# Altium PCB HI_Amplifier.PcbDoc
Units mil, origin at the board's own origin, x right, y up, seen from the top; angles counter-clockwise.
Board outline 3295 x 625 mil, 2 copper layers (Top Layer, Bottom Layer); 46 components, 26 nets, 116 pads, 329 vias.
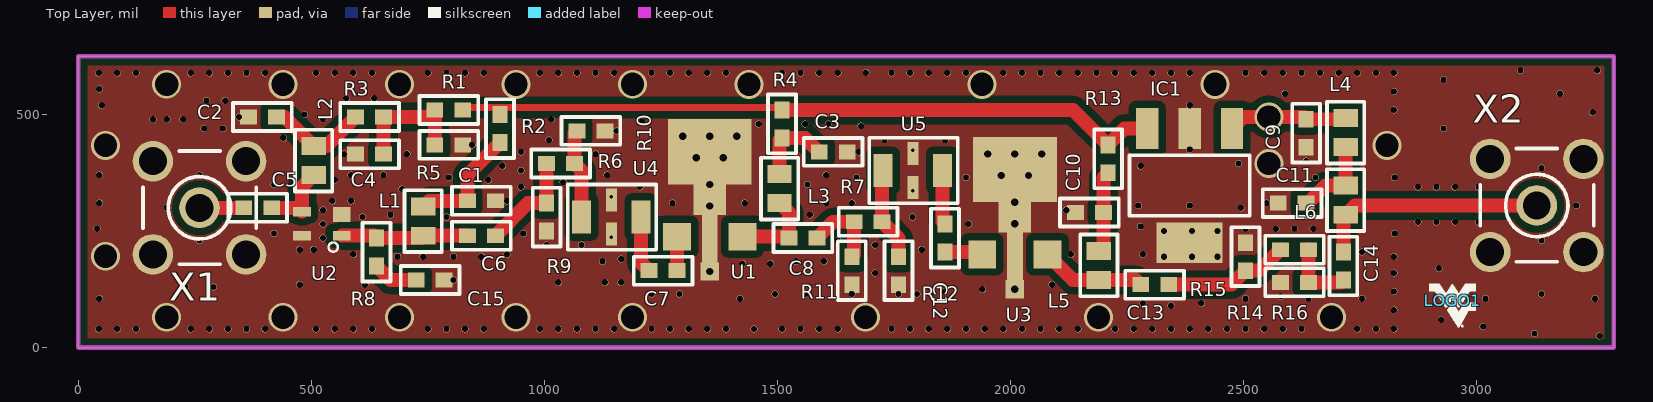
[diagram p0: Top Layer view]
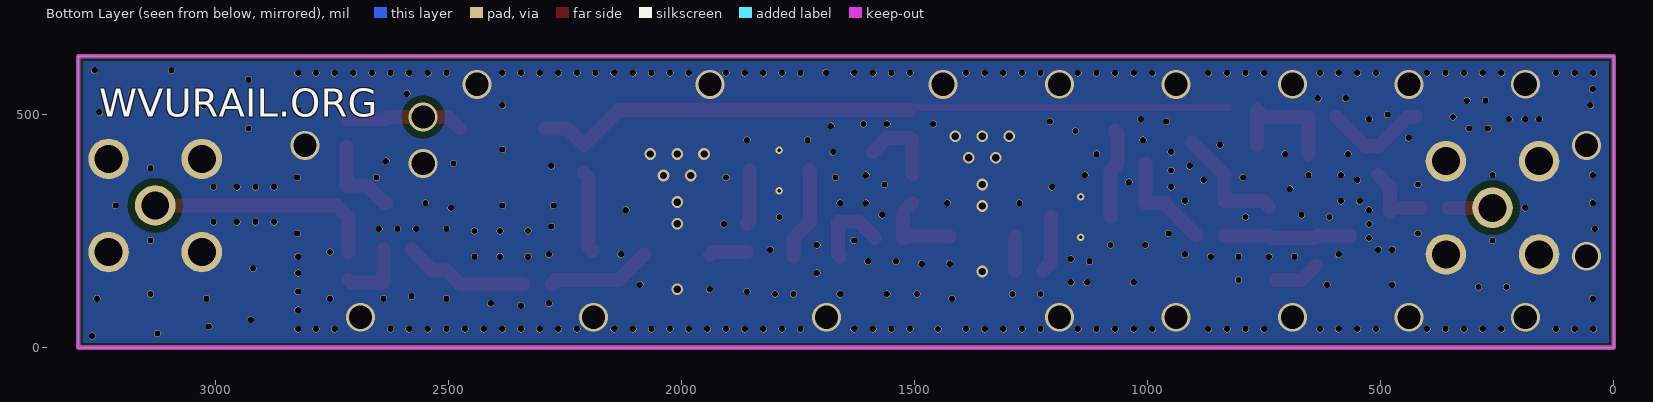
[diagram p1: Bottom Layer view, seen from below]

## Layer stack, top to bottom
Top Solder: solder mask 0.4, Solder Resist, Dk 3.5
Top Layer: signal copper 1.4
Dielectric 1: dielectric 12.6, FR-4, Dk 4.8
Bottom Layer: signal copper 1.4
Bottom Solder: solder mask 0.4, Solder Resist, Dk 3.5

## Board outline
0,0 0,625 3295,625 3295,0

## Design rules (kind name [scope] priority, off if disabled: settings)
Clearance Clearance_1 [InNamedPolygon('Top Layer-GND')] p1: gap=15 ignorepadtopadclearanceinfootprint=FALSE except(0: Arc-Hole Track-Hole SMDPad-Hole THPad-Hole Via-Hole Fill-Hole Poly-Hole Region-Hole Text-Hole; 10: SMDPad-SMDPad SMDPad-THPad SMDPad-Via SMDPad-Text THPad-THPad THPad-Via THPad-Text Via-Via Via-Text Fill-Fill Fill-Poly Fill-Region Fill-Text Poly-Poly Poly-Region Poly-Text Region-Region Region-Text Text-Text)
Clearance [All] p2: gap=5 ignorepadtopadclearanceinfootprint=FALSE except(0: Arc-Text Arc-Hole Track-Text Track-Hole SMDPad-Text SMDPad-Hole THPad-Text THPad-Hole Via-Text Via-Hole Fill-Text Fill-Hole Poly-Text Poly-Hole Region-Text Region-Hole Text-Text Text-Hole; 3: SMDPad-SMDPad SMDPad-THPad SMDPad-Via THPad-Via Via-Via; 10: THPad-THPad; 15: THPad-Fill THPad-Poly THPad-Region Via-Fill Via-Poly Via-Region)
ComponentClearance [All] p1: gap=0 collisioncheckmode=3 verticalgap=0 showdistances=FALSE
PolygonConnect PolygonConnect_2 [All vs IsNamedPolygon('Bottom Layer-GND')] p1: connectstyle=Direct reliefconductorwidth=10 reliefentries=4 polygonreliefangle="90 Angle" airgapwidth=10
PolygonConnect PolygonConnect_1 [All vs IsNamedPolygon('Top Layer-GND')] p2: connectstyle=Direct reliefconductorwidth=10 reliefentries=4 polygonreliefangle="90 Angle" airgapwidth=10
PolygonConnect [All] p3: connectstyle=Relief reliefconductorwidth=10 reliefentries=4 polygonreliefangle="90 Angle" airgapwidth=10
RoutingVias [All] p1: holewidth=28 width=50 viastyle="Through Hole" minholewidth=28 minwidth=50 maxholewidth=28 maxwidth=50
SolderMaskExpansion [All] p1: expansion=4
Width [All] p1: maxlimit=50 minlimit=10 preferedwidth=30 bottomlayer_maxwidth=10 bottomlayer_prefwidth=10 minimp=50.000000 maximp=50.000000 favimp=50.000000
29 further rules are at their usual default settings.

## Components (designator, comment, footprint, x,y, rotation, side; value= is the part's Value field where it differs from the comment)
C1 "27pF" 0603 835,315 r0 top
C2 "330pF" 0603 365,495 r0 top
C3 "330pF" 0603 1590,420 r0 top
C4 "4700pF" 0603 595,415 r0 top
C5 "27pF" 0603 355,300 r0 top
C6 "27pF" 0603 835,240 r0 top
C7 "330pF" 0603 1225,165 r0 top
C8 "330pF" 0603 1525,235 r0 top
C9 "330nF" 0603 2635,490 r270 top
C10 "330pF" 0603 2200,290 r180 top
C11 "330pF" 0603 2635,310 r180 top
C12 "330pF" 0603 1860,265 r270 top
C13 "330pF" 0603 2280,135 r0 top
C14 "330pF" 0603 2715,145 r90 top
C15 "27pF" 0603 785,145 r180 top
IC1 "Voltage Regulator LM2940" SOT223 2385,348 r180 top
L1 "100nH" 0805 740,240 r90 top
L2 "10nH" 0805 505,370 r90 top
L3 "100nH" 0805 1505,310 r90 top
L4 "100nH" 0805 2720,430 r90 top
L5 "100nH" 0805 2190,145 r90 top
L6 "100nH" 0805 2720,285 r90 top
LOGO1 "WVULOGO1" WVULOGO1 2950,100 r0 top
R1 "33k" 0603 765,510 r0 top value=DNL
R2 "27" 0603 905,440 r90 top value=DNL
R3 "50" 0603 595,495 r0 top value=DNL
R4 "43" 0603 1510,450 r90 top value=DNL
R5 "4.7k" 0603 825,435 r180 top value=DNL
R6 "5.8" 0603 1005,395 r0 top value=DNL
R7 "5.8" 0603 1665,270 r0 top value=DNL
R8 "50" 0603 640,175 r90 top value=DNL
R9 "870" 0603 1005,250 r90 top value=DNL
R10 "870" 0603 1130,465 r180 top value=DNL
R11 "870" 0603 1660,135 r90 top value=DNL
R12 "870" 0603 1760,135 r90 top value=DNL
R13 "43" 0603 2210,375 r90 top value=DNL
R14 "5.8" 0603 2580,210 r0 top value=DNL
R15 "870" 0603 2505,225 r270 top value=DNL
R16 "870" 0603 2580,140 r0 top value=DNL
U1 "GALI 39+" SBA5089 1355,420 r0 top
U2 "SAV-541" SOT343 522,265.59 r90 top
U3 "GALI 39+" SBA5089 2009.92,382.09 r0 top
U4 "BFCN-1445" FV1206 1080,280 r0 top
U5 "BFCN-1445" FV1206 1727.05,380 r0 top
X1 "J1" LTI-SASF54GT 260,300 r0 top
X2 "SMA vertical PCB thrue hole jack   Source: Lighthorse Technologies, inc. SASF54GT.pdf" LTI-SASF54GT 3130,305 r0 top

## Footprints (in the part's own frame and the unit in brackets; to place one, negate y for a bottom-side part, rotate by r counter-clockwise, add the part's x,y. Pads: shape width x height; smd on the part's side, far side on the other; paste and mask are expansions set on the pad)
0603 [mil]
  rect 36x32 smd: 1(0,0) 2(60,0)
  silkscreen extent -33,-30 93,30
0805 [mil]
  rect 38.5x52 smd: 1(0,0) 2(62.5,0)
  silkscreen extent -35,-40 98,40
FV1206 [mm]
  rect 1.04x1.8 smd: 1(0,0) 3(3.25,0)
  rect 0.61x1.245 smd: 2(1.625,-0.927) 4(1.625,0.928)
  round 0.4 hole 0.203: 2_1(1.625,-1.105) 4_1(1.625,1.105)
  silkscreen extent -0.76,-1.78 4.06,1.78
LTI-SASF54GT [mil]
  round 87 hole 60: 1(0,0) 2(-100,100) 3(100,100) 4(100,-100) 5(-100,-100)
  silkscreen extent -121,-121 122,122
SBA5089 [mm]
  rect 1.52x1.52 smd: 1(-1.78,-4.625) 3(1.78,-4.625)
  rect 1x1 smd: 2(0,-6.525)
  rect 0.86x2.61 smd: 2_1(0,-4.725)
  rect 1.78x1.65 smd: 2_2(0,-2.605)
  rect 4.57x3.56 smd: 2_3(0,0)
SOT223 [mil]
  rect 48x88 smd: 1(-91,-122) 2(0,-122) 3(91,-122)
  rect 142x87 smd: 4(0,123)
  silkscreen extent -129,-65 129,65
SOT343 [mil]
  rect 20x38 smd: 1(-25.59,-43.31) 3(26,42) 4(-25.59,42)
  rect 32x38 smd: 2(20,-43.31)
  silkscreen extent -60,-35 -40,-15
WVULOGO1 [mil]
  silkscreen extent -51,-56 49,37

## Part data
C1 C2 C3 C4 C5 C6 C7 C8 C9 C10 C11 C12 C13 C14 C15: library part Cap0603, "Capacitor, Ceramic, 0603"
IC1: library part V_REG_LM2940SOT223_1
L1 L2 L3 L4 L5 L6: library part Inductor0, "Inductor", Manufacturer="Taiyo Yuden", Manufacturers P/N=CBL2012T470M, Param=0603
R1 R2 R3 R4 R5 R6 R7 R8 R9 R10 R11 R12 R13 R14 R15 R16: library part Res0603, "Resistor", Param=1%, Param1=100ppm/C
U1 U3: "RFMD Amplifier DC-5Ghz", ManufPartNumber="GALI 39+", PartConstraints="NF=2.4dB , IP3=23dBm, S21=21dB"
U4 U5: Manufacturer=Minicircuits, CanPurchaseFrom=Minicircuits, Manufacturers P/N=BFCN-1445, Part constraints=BFCN-1445
X1 X2: library part LTI-SASF54GT, OC_FARNELL=unknown, OC_NEWARK=unknown

## Via types
v1: diameter 15, hole 13.5, Top Layer to Bottom Layer, 292 vias
v2: diameter 62, hole 50, Top Layer to Bottom Layer, 21 vias
v3: diameter 25.2, hole 15.75, Top Layer to Bottom Layer, 16 vias

## Nets (pads, with @x,y where several pads share a name; then routed paths per layer and width w, separated by ;. In a path a pad name is that pad's centre, name@x,y a point inside that pad or via, vN(x,y) a via of type N, cw(c..) or ccw(c..) an arc to the next point about the centre after c; other vN are vias at no path point)
GND: C1.2 C2.1 C3.2 C4.1 C9.2 C10.2 C11.2 C15.1 IC1.2 IC1.4 R5.1 R9.1 R10.1 R11.1 R12.1 R15.1 R16.1 U1.2 U1.2_1 U1.2_2 U1.2_3 U2.2 U2.4 U3.2 U3.2_1 U3.2_2 U3.2_3 U4.2 U4.2_1 U4.4 U4.4_1 U5.2 U5.2_1 U5.4 U5.4_1 X1.2 X1.3 X1.4 X1.5 X2.2 X2.3 X2.4 X2.5
  other v1: 3265,25 3125,30 43.67,40.25 83.67,40.25 123.67,40.25 241,40.23 281,40.23 321,40.23 361,40.23 401,40.23 510,40.25 550,40.25 590,40.25 630,40.25 750,40.25 790,40.25 830,40.25 870,40.25 990,40.25 1030,40.25 1070,40.25 1110,40.25 1150,40.25 1230,40.25 1270,40.25 1310,40.25 1350,40.25 1390,40.25 1450,40 1510,40.25 1550,40.25 1590,40.25 1630,40.25 1745,40.25 1785,40.25 1825,40.25 1865,40.25 1905,40.25 1945,40.25 1985,40.25 2025,40.25 2065,40.25 2105,40.25 2145,40.25 2225,40.25 2265,40.25 2305,40.25 2345,40.25 2385,40.25 2425,40.25 2465,40.25 2505,40.25 2545,40.25 2585,40.25 2625,40.25 2745,40.25 2785,40.25 2823.19,40.25 3015,45 2925,60 2823.19,80.25 2345,90 2285,95 2410,95 45,105 1420,105 2505,105 2640,105 2755,105 3020,105 3255,105 2580,110 1230,115 1290,115 1495,115 1560,115 1660,115 1760,115 1800,115 3140,115 1860,120 2823.19,120.25 1940,125 230,130 290,130 475,135 615,135 2090,135 1030,140 1130,140 1165,140 805,145 1710,160 2823.19,160.25 2920,170 1425,180 1485,180 1125,185 1540,185 1600,185 1165,190 685,195 740,195 805,195 865,195 2330,195 2390,195 2445,195 2823.19,195 590,200 920,200 2130,200 2285,200 2755,205 475,210 505,210 1810,210 1005,220 1080,220 1710,220 260,230 1630,230 3140,230 525,235 420,245 955,245 2825,245 2330,250 2390,250 2445,250 40,255 2505,255 2570,255 2610,255 2650,255 2280,260 525,265 1910,265 2875,270 2915,270 2955,270 3005,270 610,280 790,280 1790,280 670,285 1570,285 525,295 2120,295 190,300 2495,300 2275,305 2385,305 3215,305 45,310 1275,310 1430,310 1605,310 1660,310 2550,310 545,315 585,315 920,315 695,340 950,345 1205,345 2875,345 2915,345 2955,345 3005,345 420,350 1565,350 1040,355 550,360 880,360 795,365 1670,365 1905,365 2655,365 2825,365 45,370 260,370 585,370 655,370 1135,370 1605,370 950,380 3140,385 910,390 2280,390 2490,395 2635,400 570,415 705,415 1110,415 950,420 1675,420 2385,425 845,435 1010,445 1730,445 1860,445 440,450 1155,465 270,470 310,470 2930,470 1680,475 1460,480 1560,480 1610,480 960,485 1210,485 160,490 190,490 225,490 525,490 1015,490 345,495 485,500 3250,505 2823.19,509.75 50,520 2385,520 3025,520 275,530 315,530 575,535 635,535 2590,545 3180,545 2823.19,549.75 45,555 2930,575 43.67,589.75 83.67,589.75 123.67,589.75 241,589.77 281,589.77 321,589.77 361,589.77 401,589.77 510,589.75 550,589.75 590,589.75 630,589.75 750,589.75 790,589.75 830,589.75 870,589.75 990,589.75 1030,589.75 1070,589.75 1110,589.75 1150,589.75 1230,589.75 1270,589.75 1310,589.75 1350,589.75 1390,589.75 1510,589.75 1550,589.75 1590,589.75 1630,589.75 1690,590 1745,589.75 1785,589.75 1825,589.75 1865,589.75 1905,589.75 1985,589.75 2025,589.75 2065,589.75 2105,589.75 2145,589.75 2185,589.75 2225,589.75 2265,589.75 2305,589.75 2345,589.75 2385,589.75 2505,589.75 2545,589.75 2585,589.75 2625,589.75 2665,589.75 2705,589.75 2745,589.75 2785,589.75 2823.19,589.75 3095,595 3260,595
  other v2: 189.43,65 439.43,65 689.43,65 939.43,65 1189.43,65 1689.43,65 2189.43,65 2689.43,65 58.43,196 2555,395 58.43,434 2808.43,434 189.43,565 439.43,565 689.43,565 939.43,565 1189.43,565 1439.43,565 1939.43,565 2439.43,565
  other v3: 2009.92,125.2 1355,163.11 2009.92,265.94 1355,303.86 2009.92,312.2 1355,350.12 1980.79,369.29 2039.06,369.29 1325.87,407.2 1384.13,407.2 1952.05,415.55 2009.92,415.55 2067.8,415.55 1297.13,453.46 1355,453.46 1412.87,453.46
NetC1_1: C1.1 L1.2 R2.1 | length 254.2
  Top Layer w30: L1.2 752.5,315 C1.1 835,370 R2.1
NetC2_2: C2.2 L2.2 R3.1 | length 221.8
  Top Layer w30: C2.2 442.5,495 L2.2 532.5,432.5 R3.1
NetC3_1: C3.1 L3.2 R4.1 | length 172
  Top Layer w30: L3.2 1505,445 R4.1 1560,450 C3.1
NetC4_2: C4.2 R1.1 R3.2 R5.2 | length 271.2
  Top Layer w30: C4.2 R3.2 750,495 R1.1 R5.2
NetC5_1: C5.1 X1.1 | length 95
  Top Layer w30: X1.1 C5.1
NetC5_2: C5.2 L2.1 U2.3 | length 157.2
  Top Layer w30: C5.2 471.59,300 U2.3 480,345 L2.1
NetC6_1: C6.1 L1.1 R8.2 U2.1 | length 273.8
  Top Layer w30: U2.1 635,240 R8.2 735,235 L1.1 C6.1
NetC6_2: C6.2 R6.1 R9.2 | length 224
  Top Layer w30: C6.2 965,310 R9.2 R6.1
NetC7_1: C7.1 U4.3 | length 122.1
  Top Layer w30: U4.3 1207.95,182.05 C7.1
NetC7_2: C7.2 U1.1 | length 72.9
  Top Layer w30: U1.1 1285,237.84 C7.2
NetC8_1: C8.1 L3.1 U1.3 | length 184.4
  Top Layer w30: U1.3 1522.09,237.91 C8.1 1525,290 L3.1
NetC8_2: C8.2 R7.1 R11.2 | length 171.6
  Top Layer w30: C8.2 1620,270 R7.1 1665,200 R11.2
NetC9_1: C9.1 IC1.1 L4.2 | length 257.5
  Top Layer w30: IC1.1 2501,495 v2(2555,495) 2630,495 C9.1 2717.5,490 L4.2
NetC10_1: C10.1 L5.2 R13.1 | length 175.8
  Top Layer w30: L5.2 2200,217.5 C10.1 2200,365 R13.1
NetC11_1: C11.1 L4.1 L6.2 | length 183
  Top Layer w30: C11.1 2638.89,310 2676.39,347.5 L6.2 L4.1
NetC12_1: C12.1 U5.3 | length 117.1
  Top Layer w30: U5.3 1855,270 C12.1
NetC12_2: C12.2 U3.1 | length 81.9
  Top Layer w30: C12.2 1934.84,205 U3.1
NetC13_1: C13.1 L5.1 U3.3 | length 226.9
  Top Layer w30: U3.3 2135,145 L5.1 2270,145 C13.1
NetC13_2: C13.2 R14.1 R15.2 | length 271.1
  Top Layer w30: C13.2 2475,135 R15.2 2535,165 R14.1
NetC14_1: C14.1 R14.2 R16.2 | length 147.1
  Top Layer w30: R14.2 R16.2 2710,140 C14.1
NetC14_2: C14.2 L6.1 X2.1 | length 510.4
  Top Layer w30: C14.2 2715,280 L6.1 2740,305 X2.1 X2.1@3140,305
NetC15_2: C15.2 R8.1 | length 97.4
  Top Layer w30: R8.1 670,145 C15.2
NetIC1_3: IC1.3 R1.2 R2.2 R4.2 R13.2 | length 1514.6
  Top Layer w15: R1.2@825,515 R4.2@1510,515
  Top Layer w30: R4.2 2135,510 R13.2 2245,470 IC1.3
NetR6_2: R6.2 R10.2 U4.1 | length 193.3
  Top Layer w30: R10.2 1065,460 R6.2 1080,380 U4.1
NetR7_2: R7.2 R12.2 U5.1 | length 200.3
  Top Layer w30: U5.1 1725,377.95 R7.2 1760,235 R12.2

## Polygon pours and split planes (outlines as drawn)
GND on Bottom Layer "Bottom Layer-GND" (solid, remove dead copper, pour order 2): 0,625 3295,625 3295,0 0,0
GND on Top Layer "Top Layer-GND" (solid, remove dead copper, pour order 0): 0,625 3295,625 3295,0 0,0

## Keep-outs
Keep-Out Layer:
  the board outline again, w10

## Silkscreen, mask and mechanical layers (free items; w line width, h text height)
Bottom Overlay:
  text "WVURAIL.ORG" at 3250,495 h60
Top Solder:
  rectangle: 12.4,173.5 74.92,395
  rectangle: 2791.93,350 2854.45,621.02
  rectangle: 12.4,355 74.92,581.5
  rectangle: 12.4,8.98 2824.92,71.5
  rectangle: 12.4,558.5 2824.92,621.02
  rectangle: 2791.93,8.98 2854.45,265
  rectangle: 12.4,48.5 74.92,270
  rectangle: 12.4,8.98 2824.92,71.5
  rectangle: 12.4,558.5 2824.92,621.02